# Altium PCB Hyperloop_BTCU-PCB.PcbDoc
Units mil, origin at the board's own origin, x right, y up, seen from the top; angles counter-clockwise.
Board outline 3700 x 3000 mil, 4 copper layers (Top Copper, Plane (GND), Plane (+5V), Bottom Copper), stack 61.811 mil thick; 103 components, 77 nets, 340 pads, 93 vias.
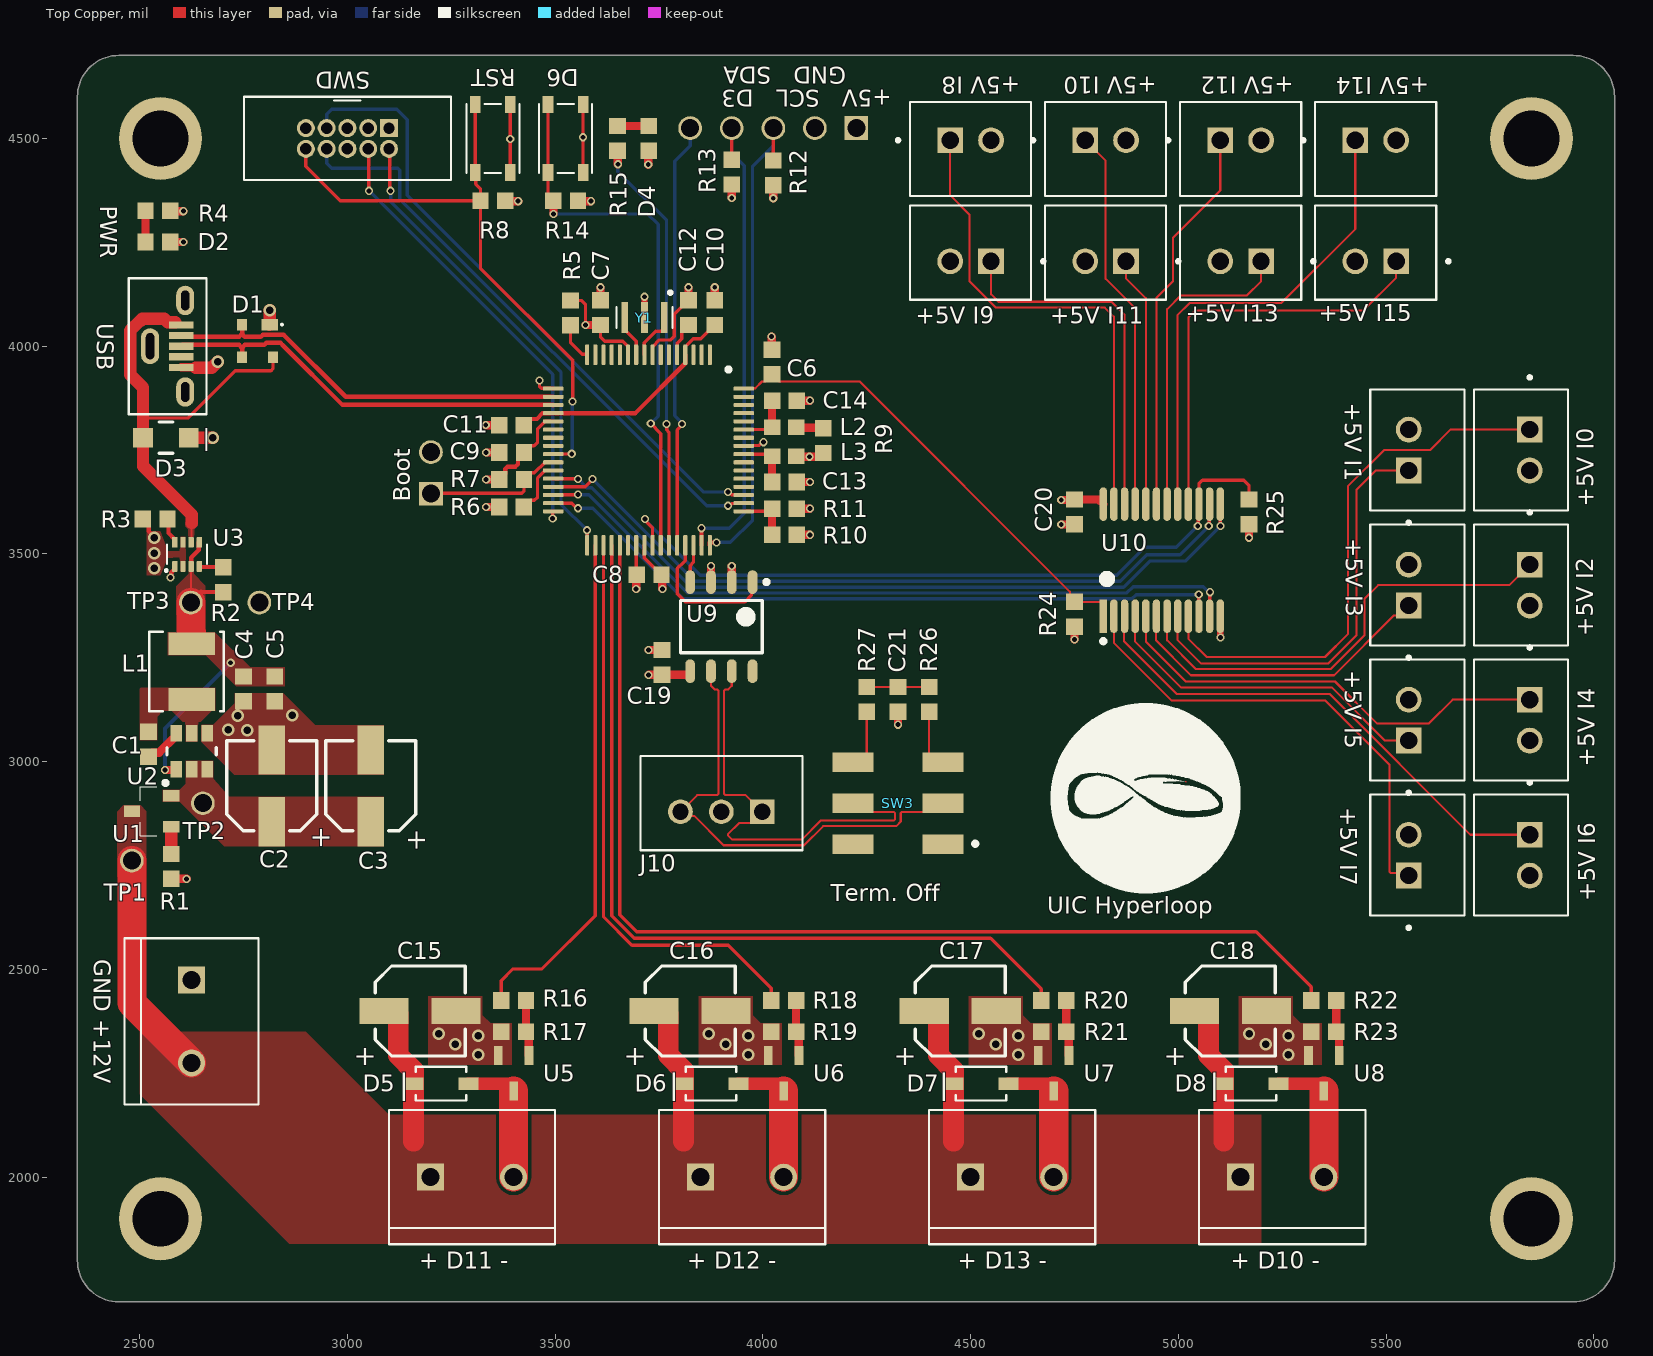
[diagram p0: Top Copper view]
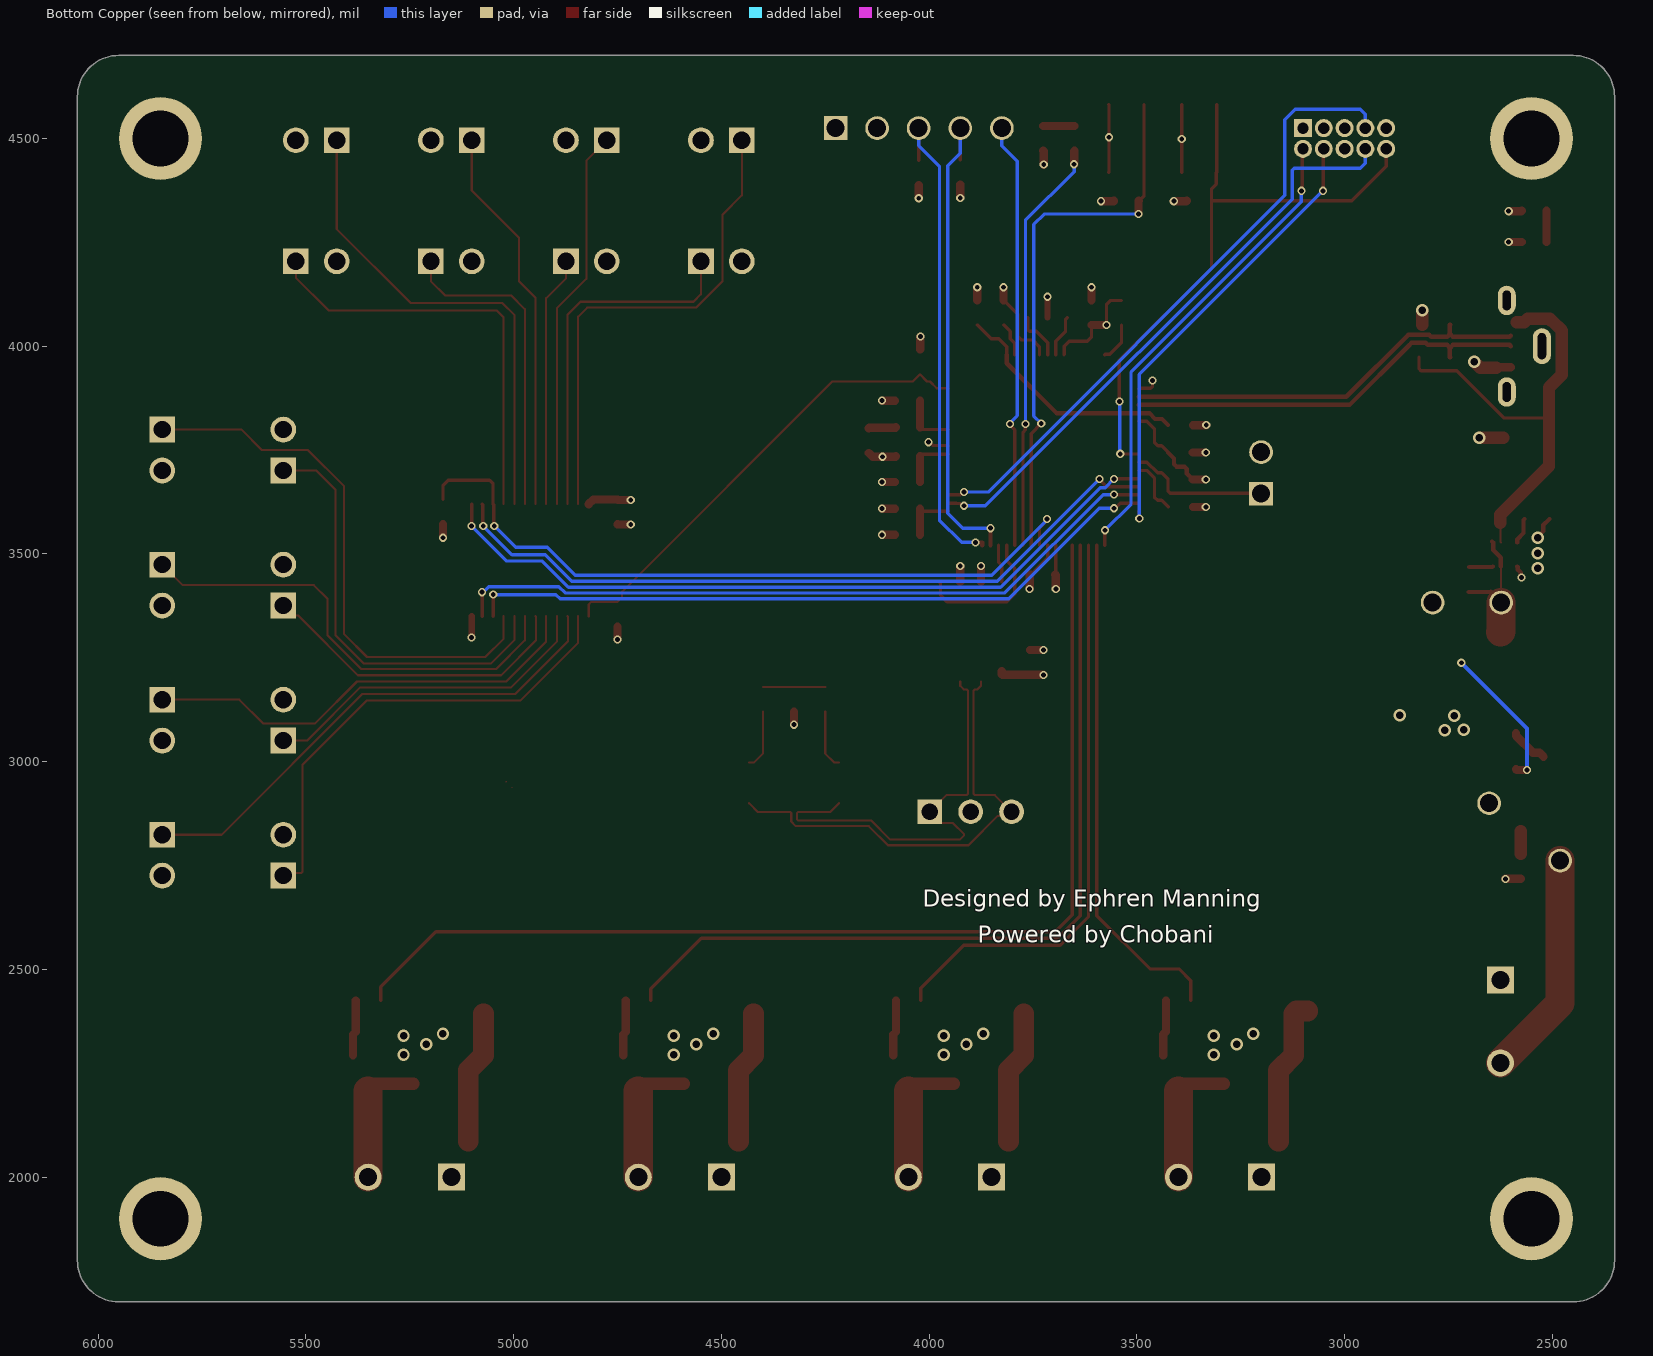
[diagram p1: Bottom Copper view, seen from below]
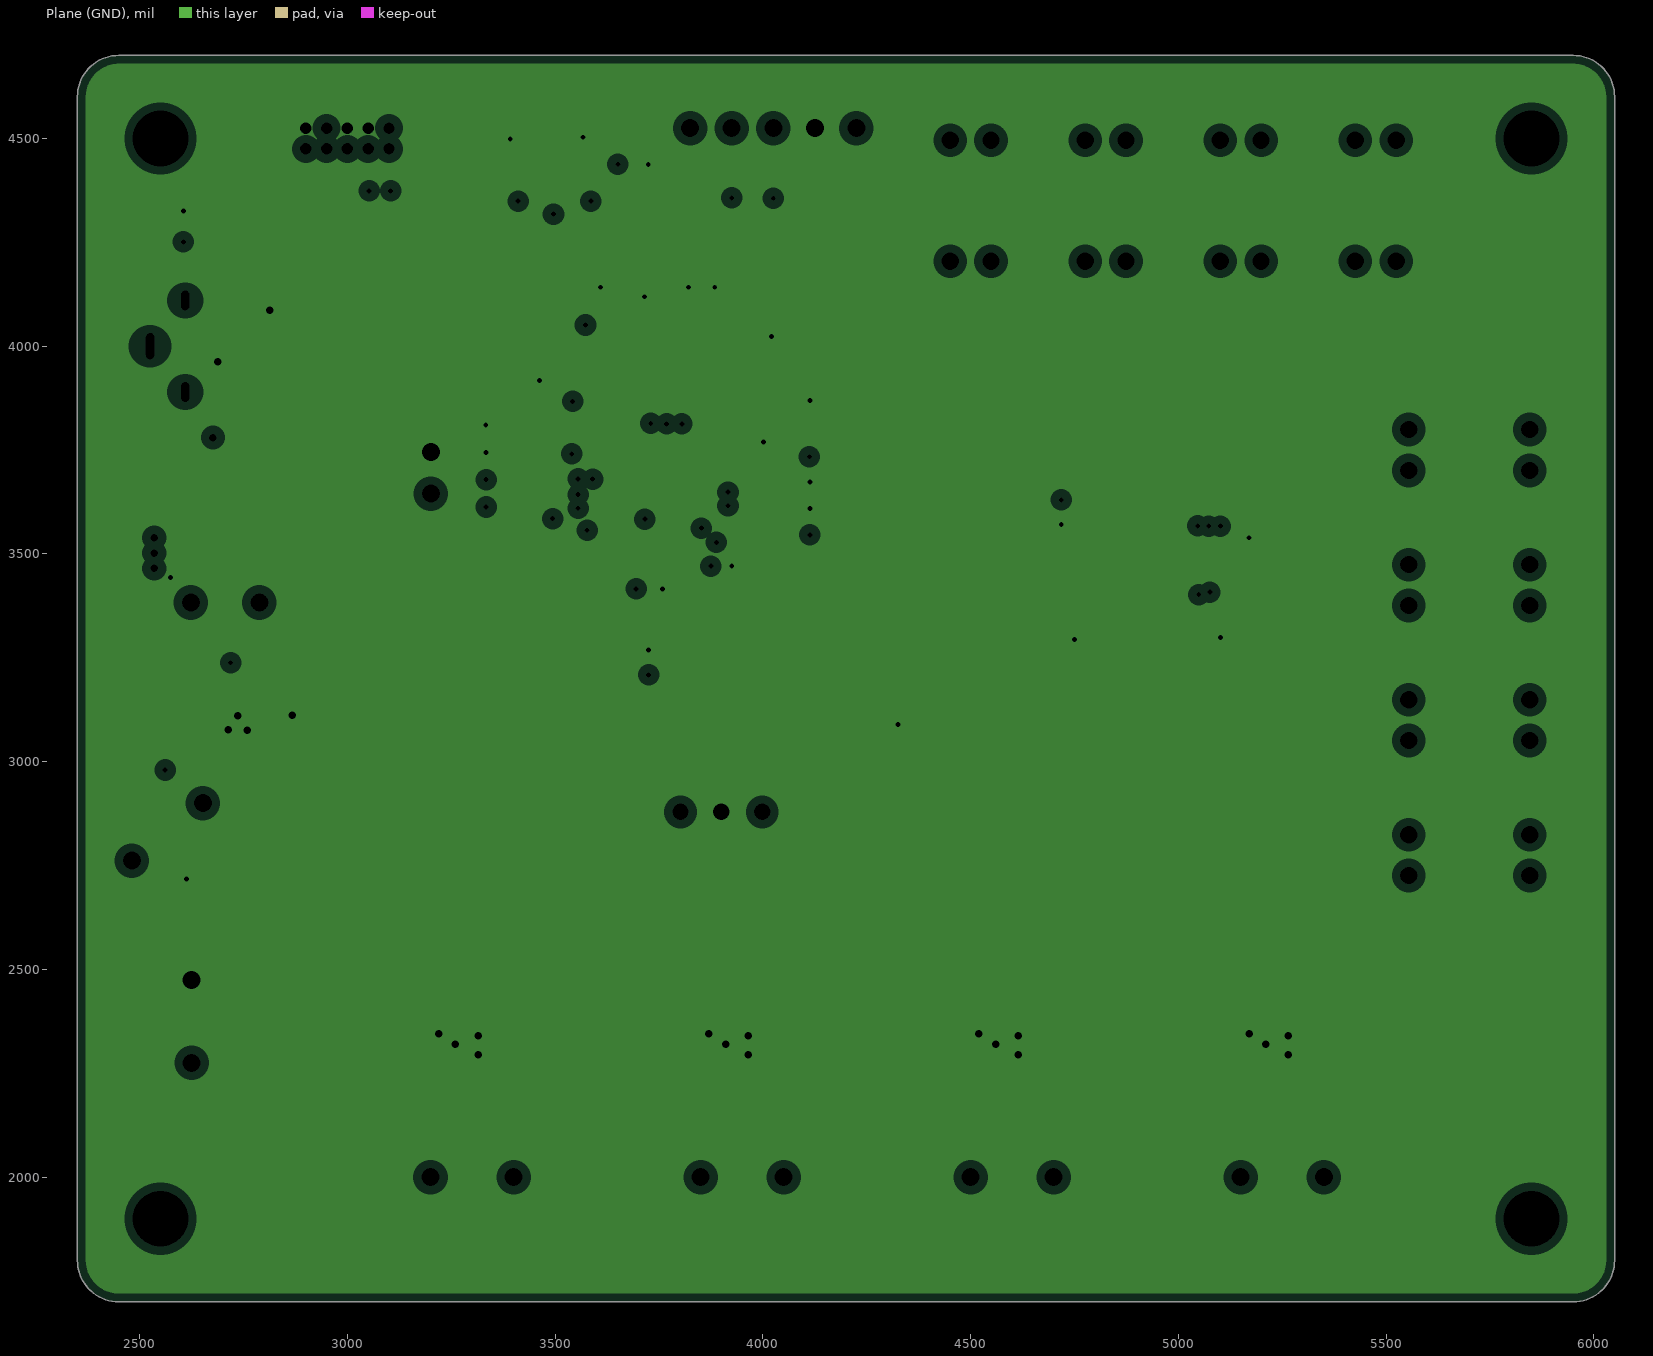
[diagram p2: Plane (GND), clearances drawn from the general rule]
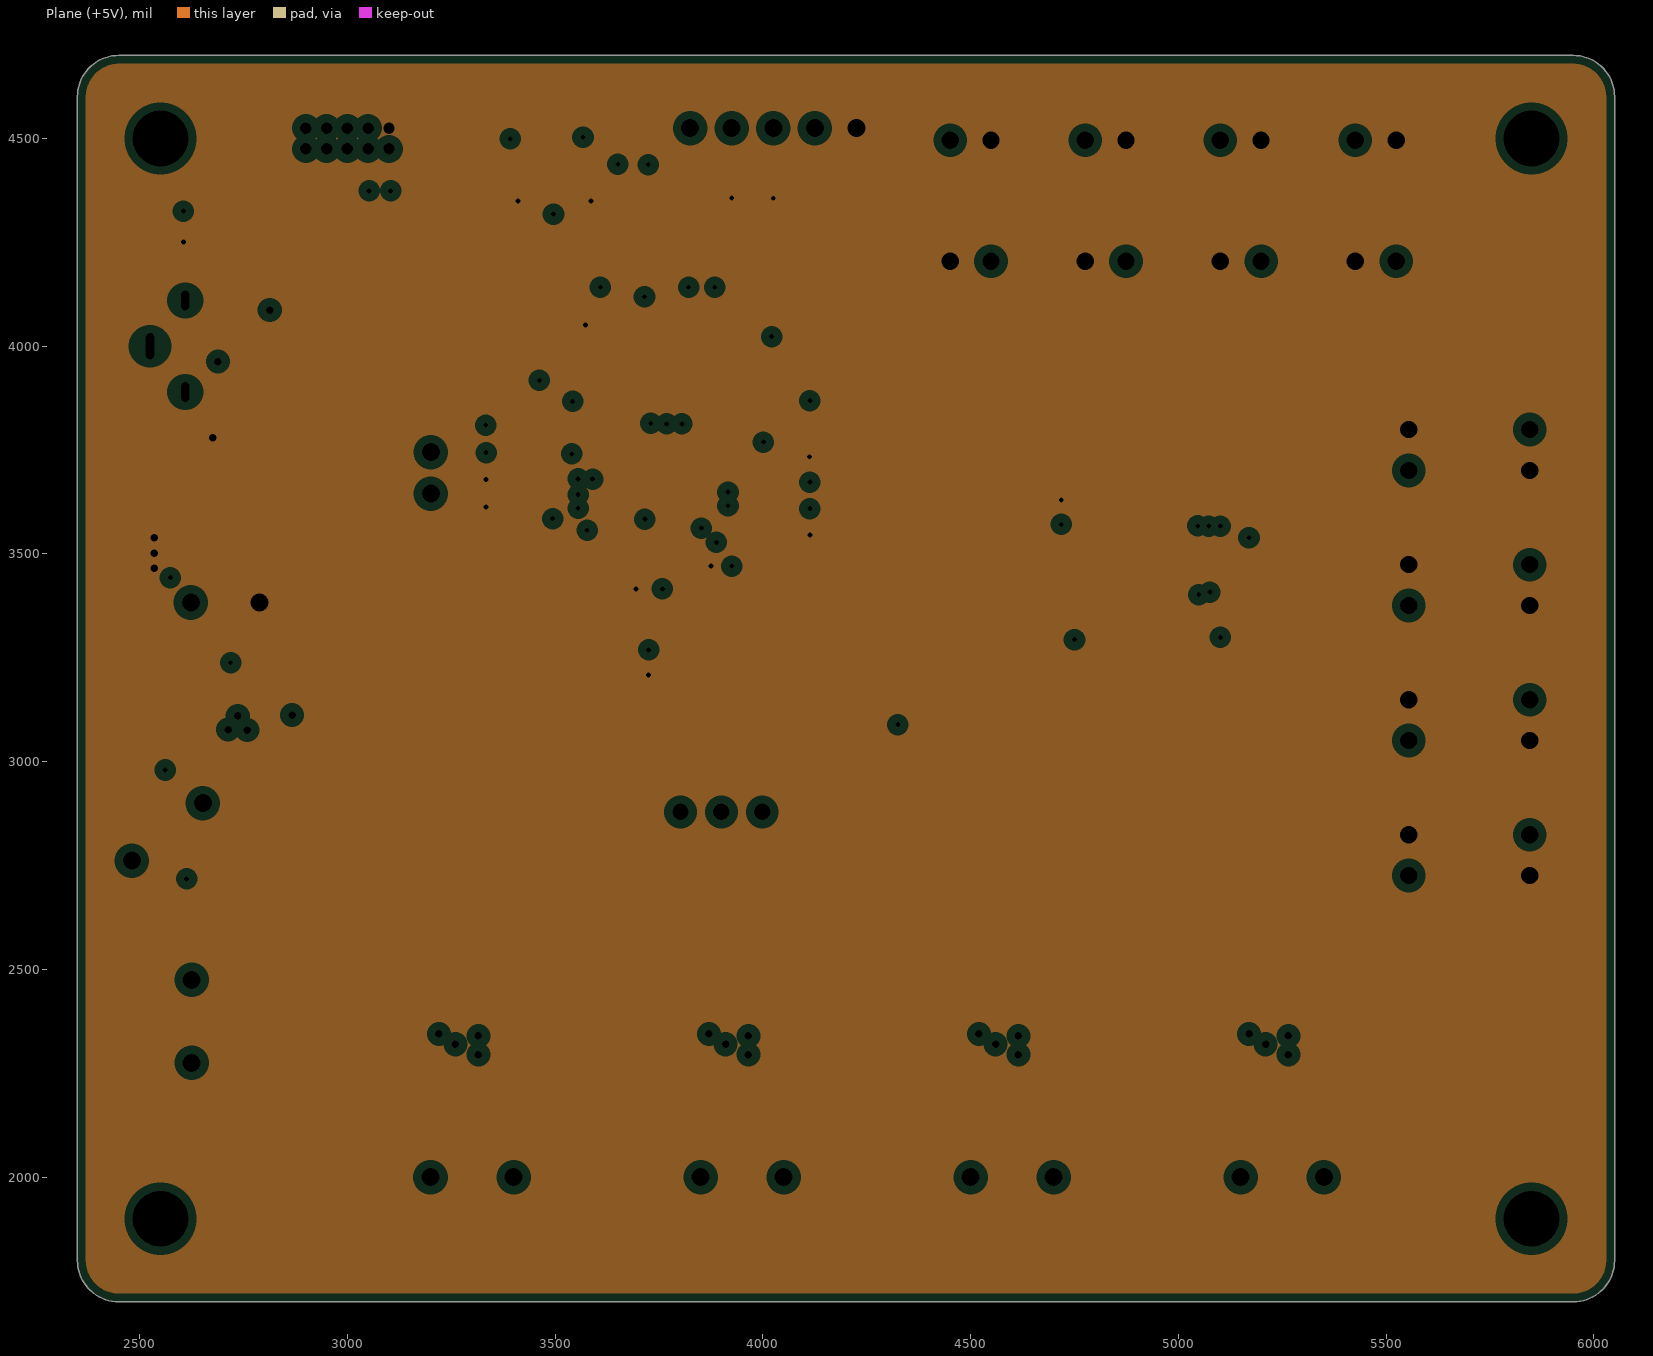
[diagram p3: Plane (+5V), clearances drawn from the general rule]
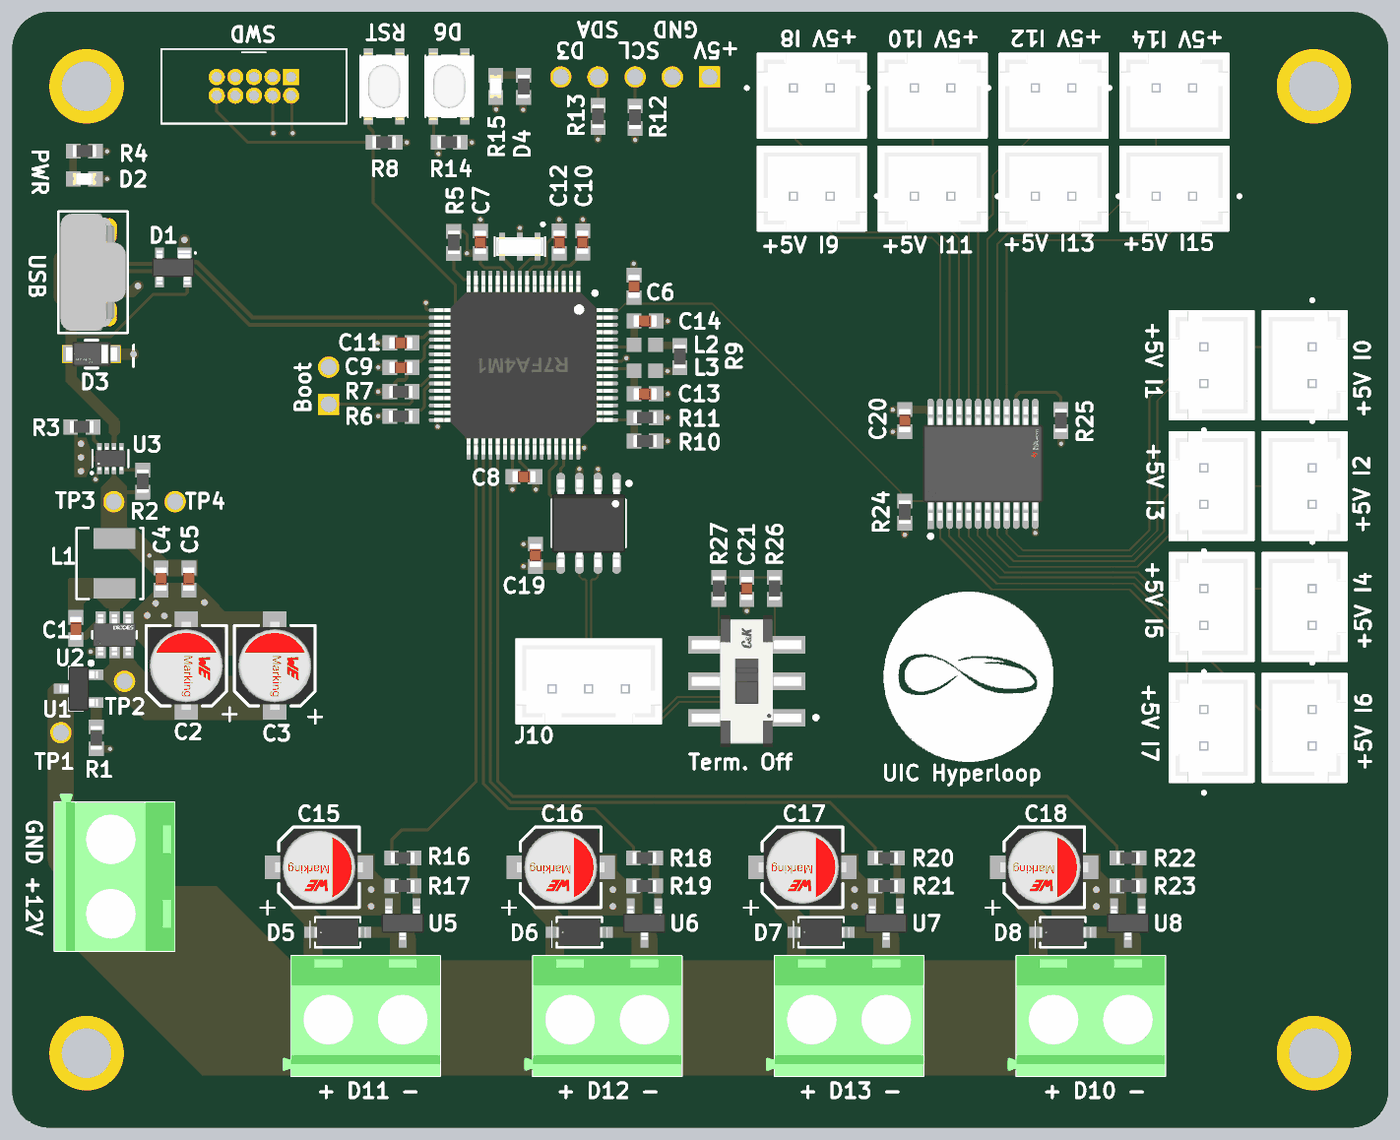
[diagram p4: 3D render of the assembled board from above, using the file's embedded part models]

## Layer stack, top to bottom
Top Mask: solder mask 0.591, Solder Resist, Dk 3.8
Top Copper: signal copper 1.378
Dielectric 1: prepreg 7.874, 7628, Dk 4.6
Plane (GND): plane copper 0.689, net GND
Core: core 41.929, FR-4, Dk 4.5
Plane (+5V): plane copper 0.689, net +5V
Dielectric 2: prepreg 7.874, 7628, Dk 4.6
Bottom Copper: signal copper 1.378
Bottom Mask: solder mask 0.591, Solder Resist, Dk 3.8

## Board outline
2350,1800 2350,4600 cw(c2450,4600) 2450,4700 5950,4700 cw(c5950,4600) 6050,4600 6050,1800 cw(c5950,1800) 5950,1700 2450,1700 cw(c2450,1800)

## Design rules (kind name [scope] priority, off if disabled: settings)
BoardOutlineClearance [All] p1: gap=7.87 ignorepadtopadclearanceinfootprint=FALSE except(15.75: Arc-SplitBarrior Arc-SplitContinuation Track-SplitBarrior Track-SplitContinuation SMDPad-SplitBarrior SMDPad-SplitContinuation THPad-SplitBarrior THPad-SplitContinuation Via-SplitBarrior Via-SplitContinuation Fill-SplitBarrior Fill-SplitContinuation Poly-SplitBarrior Poly-SplitContinuation Region-SplitBarrior Region-SplitContinuation Text-SplitBarrior Text-SplitContinuation)
Clearance [All] p1: gap=7.87 ignorepadtopadclearanceinfootprint=TRUE except(3.5: Arc-Arc Arc-Track Arc-SMDPad Track-Track Track-SMDPad SMDPad-SMDPad; 5: Arc-Via Track-Via SMDPad-Via THPad-Via Via-Via; 10: Arc-Text Track-Text SMDPad-Text THPad-Text Via-Text Fill-Text Poly-Text Region-Text Text-Text)
DiffPairsRouting DiffPairsRouting-CAN [InDifferentialPair('CAN')] p1: maxlimit=8.3 minlimit=8.3 mostfreqgap=8.3 toplayer_minwidth=5.11 toplayer_maxwidth=5.11 toplayer_prefwidth=5.11 bottomlayer_minwidth=5.11 bottomlayer_maxwidth=5.11 bottomlayer_prefwidth=5.11 impedanceprofiledriven=TRUE impedanceprofileid={14C260C6-A4EA-48F1-8B74-18B56ED2C369} impedanceprofilevalue=120.000000 maxuncoupledlength=500
DiffPairsRouting DiffPairsRouting-USB [InDifferentialPair('USB_D')] p2: maxlimit=8.3 minlimit=8.3 mostfreqgap=8.3 toplayer_minwidth=11 toplayer_maxwidth=11 toplayer_prefwidth=11 bottomlayer_minwidth=11 bottomlayer_maxwidth=11 bottomlayer_prefwidth=11 impedanceprofiledriven=TRUE impedanceprofileid={F6B63595-90AE-426A-86AF-9529F4F763D2} impedanceprofilevalue=90.000000 maxuncoupledlength=500
HoleSize [All] p1: absolutevalues=TRUE maxlimit=248.03 minlimit=7.87 maxpercent=80.000 minpercent=20.000
MinimumAnnularRing [All] p1: minimumring=3
MinimumSolderMaskSliver [All] p1 off: minsoldermaskwidth=3.94
PlaneClearance [All] p1: clearance=20
PlaneConnect [All] p1: planeconnectstyle=Direct reliefexpansion=20 reliefentries=4 reliefconductorwidth=10 reliefairgap=10
PolygonConnect PolygonConnect_1 [All] p1: connectstyle=Direct reliefconductorwidth=20 reliefentries=4 polygonreliefangle="90 Angle" airgapwidth=10
RoutingCorners [All] p1: cornerstyle=Round minsetback=100 maxsetback=100
RoutingVias [All] p1: holewidth=19.68 width=39.37 viastyle="Through Hole" minholewidth=7.87 minwidth=17.72 maxholewidth=39.37 maxwidth=78.74
SilkToSilkClearance [All] p1: silktosilkclearance=3.94
SilkToSolderMaskClearance [IsPad] p1: minsilkscreentomaskgap=3.94 clearancetoexposedcopper=TRUE
SolderMaskExpansion [All] p1: expansion=0 istentingtop=FALSE
UnRoutedNet [All] p1: checkbadconnections=TRUE
Width [All] p1: maxlimit=100 minlimit=3.5 preferedwidth=15
21 further rules are at their usual default settings.

## Classes and differential pairs
component class U_3_Peripherals: "+5V I0" "+5V I1" "+5V I2" "+5V I3" "+5V I4" "+5V I5" "+5V I6" "+5V I7" "+5V I8" "+5V I9" "+5V I10" "+5V I11" "+5V I12" "+5V I13" "+5V I14" "+5V I15" "+ D11 -" C15 C16 C17 C18 C19 C20 C21 D5 D6 D7 D8 J10 R16 R17 R18 R19 R20 R21 R22 R23 R24 R25 R26 R27 SW3 U5 U6 U7 U8 U9 U10
component class U_2_MCU: Boot C6 C7 C8 C9 C10 C11 C12 C13 C14 D4 L2 L3 R5 R6 R7 R8 R9 R10 R11 R12 R13 R14 R15 Y1
component class U_1_Power: C1 C2 C3 C4 C5 D1 D2 D3 L1 R1 R2 R3 R4 TP1 TP2 TP3 TP4 U1 U2 U3
differential pair USB_D: +USB_D_P -USB_D_N
differential pair CAN: +CAN_P -CAN_N

## Components (designator, comment, footprint, x,y, rotation, side; value= is the part's Value field where it differs from the comment)
"+5V I0" "B2B-XH-A" JST_B2B-XH-A 5575,3750 r270 top (schematic designator J19)
"+5V I1" "B2B-XH-A" JST_B2B-XH-A 5825,3750 r90 top (schematic designator J11)
"+5V I2" "B2B-XH-A" JST_B2B-XH-A 5575,3425 r270 top (schematic designator J20)
"+5V I3" "B2B-XH-A" JST_B2B-XH-A 5825,3425 r90 top (schematic designator J12)
"+5V I4" "B2B-XH-A" JST_B2B-XH-A 5575,3100 r270 top (schematic designator J21)
"+5V I5" "B2B-XH-A" JST_B2B-XH-A 5825,3100 r90 top (schematic designator J13)
"+5V I6" "B2B-XH-A" JST_B2B-XH-A 5575,2775 r270 top (schematic designator J22)
"+5V I7" "B2B-XH-A" JST_B2B-XH-A 5825,2775 r90 top (schematic designator J14)
"+5V I8" "B2B-XH-A" JST_B2B-XH-A 4500,4225 r0 top (schematic designator J23)
"+5V I9" "B2B-XH-A" JST_B2B-XH-A 4500,4475 r180 top (schematic designator J15)
"+5V I10" "B2B-XH-A" JST_B2B-XH-A 4825,4225 r0 top (schematic designator J24)
"+5V I11" "B2B-XH-A" JST_B2B-XH-A 4825,4475 r180 top (schematic designator J16)
"+5V I12" "B2B-XH-A" JST_B2B-XH-A 5150,4225 r0 top (schematic designator J25)
"+5V I13" "B2B-XH-A" JST_B2B-XH-A 5150,4475 r180 top (schematic designator J17)
"+5V I14" "B2B-XH-A" JST_B2B-XH-A 5475,4225 r0 top (schematic designator J26)
"+5V I15" "B2B-XH-A" JST_B2B-XH-A 5475,4475 r180 top (schematic designator J18)
"+ D10 -" "282837-2" TE_282837-2 5250,2000 r0 top (schematic designator J9)
"+ D11 -" "282837-2" TE_282837-2 3300,2000 r0 top (schematic designator J6)
"+ D12 -" "282837-2" TE_282837-2 3950,2000 r0 top (schematic designator J7)
"+ D13 -" "282837-2" TE_282837-2 4600,2000 r0 top (schematic designator J8)
Boot "2x Pin Header" "2x Pin Header-Footprint-1" 3201,3645 r90 top (schematic designator J4)
C1 "100n" CAP_0603-Footprint 2521,3042 r270 top
C2 "DNP" WCAP-AS5H_D5H5.5 2818,2942 r270 top
C3 "10u/35V" WCAP-AS5H_D5H5.5 3056,2942 r270 top
C4 "22u" CAP_0603-Footprint 2750,3175 r90 top
C5 "22u" CAP_0603-Footprint 2825,3175 r90 top
C6 "100n" CAP_0603-Footprint 4022,3962 r270 top
C7 "100n" CAP_0603-Footprint 3609,4080.88 r270 top
C8 "100n" CAP_0603-Footprint 3726,3450 r180 top
C9 "4.7u" CAP_0603-Footprint 3395,3744 r0 top
C10 "100n" CAP_0603-Footprint 3884,4081 r270 top
C11 "4.7u" CAP_0603-Footprint 3394.88,3810 r0 top
C12 "4.7u" CAP_0603-Footprint 3821,4081 r270 top
C13 "100n" CAP_0603-Footprint 4052,3673 r180 top
C14 "1u" CAP_0603-Footprint 4052,3869 r180 top
C15 "22u/25V" WCAP-ASLI_D5H5.5 3175,2400 r180 top
C16 "22u/25V" WCAP-ASLI_D5H5.5 3825,2400 r180 top
C17 "22u/25V" WCAP-ASLI_D5H5.5 4475,2400 r180 top
C18 "22u/25V" WCAP-ASLI_D5H5.5 5125,2400 r180 top
C19 "100n" CAP_0603-Footprint 3757,3238.88 r270 top
C20 "100n" CAP_0603-Footprint 4750,3601 r90 top
C21 "4.7n" CAP_0603-Footprint 4325,3150 r90 top
D1 "PRTR5V0U2X,215" SOT143B 2783.4,4012.63 r180 top
D2 "LTST-C191KGKT" LED_0603-Footprint-1 2544,4251 r0 top
D3 "DNP" FP-SOD123W-MFG 2563.12,3780 r180 top
D4 "LTST-C191KGKT" LED_0603-Footprint-1 3650,4500 r270 top
D5 "1N4007FL" SOD-123_ONS 3225,2225 r0 top
D6 "PTS810_SJM_250_SMTR_LFS" SW_PTS810_SJM_250_SMTR_LFS 3525,4500 r90 top (schematic designator SW2)
D6 "1N4007FL" SOD-123_ONS 3875,2225 r0 top
D7 "1N4007FL" SOD-123_ONS 4525,2225 r0 top
D8 "1N4007FL" SOD-123_ONS 5175,2225 r0 top
"GND +12V" "282837-2" TE_282837-2 2625,2375 r270 top (schematic designator J1)
J2 "1051330001" MOLEX_1051330001 2567.32,4000 r270 top
J5 "5x Pin Header" "5x Pin Header-Footprint-1" 4225,4525 r180 top
J10 "B3B-XH-A" JST_B3B-XH-A 3900,2900 r0 top
L1 "4.7u" IND_SRP0412-1R0K_BRN 2612.6,3216.93 r270 top
L2 "BLM18PG471SN1D" BEADC1608X95N 4051,3805 r180 top
L3 "BLM18PG471SN1D" BEADC1608X95N 4051,3735 r180 top
R1 "1k" RES_0603-Footprint-1 2576,2748 r90 top
R2 "5.1k" RES_0603-Footprint-1 2701,3438 r270 top
R3 "5.1k" RES_0603-Footprint-1 2537,3584 r180 top
R4 "604" RES_0603-Footprint-1 2544,4326 r0 top
R5 "5.1k" RES_0603-Footprint-1 3537,4080 r270 top
R6 "5.1k" RES_0603-Footprint-1 3394.88,3613 r180 top
R7 "5.1k" RES_0603-Footprint-1 3395,3679 r180 top
R8 "5.1k" RES_0603-Footprint-1 3350,4350 r0 top
R9 "5.1k" RES_0603-Footprint-1 4145,3773 r90 top
R10 "100k" RES_0603-Footprint-1 4052,3546 r0 top
R11 "13.7k" RES_0603-Footprint-1 4052,3609 r180 top
R12 "TBD" RES_0603-Footprint-1 4025,4417 r270 top
R13 "TBD" RES_0603-Footprint-1 3925,4419.12 r270 top
R14 "5.1k" RES_0603-Footprint-1 3525,4350 r0 top
R15 "604" RES_0603-Footprint-1 3725,4500 r270 top
R16 "1k" RES_0603-Footprint-1 3400,2425 r0 top
R17 "100k" RES_0603-Footprint-1 3400,2350 r0 top
R18 "1k" RES_0603-Footprint-1 4050,2425 r0 top
R19 "100k" RES_0603-Footprint-1 4050,2350 r0 top
R20 "1k" RES_0603-Footprint-1 4700,2425 r0 top
R21 "100k" RES_0603-Footprint-1 4700,2350 r0 top
R22 "1k" RES_0603-Footprint-1 5350,2425 r0 top
R23 "100k" RES_0603-Footprint-1 5350,2350 r0 top
R24 "100k" RES_0603-Footprint-1 4750,3354.88 r90 top
R25 "5.1k" RES_0603-Footprint-1 5170,3601 r90 top
R26 "60R4" RES_0603-Footprint-1 4400,3150 r90 top
R27 "60R4" RES_0603-Footprint-1 4250,3150 r90 top
RST "PTS810_SJM_250_SMTR_LFS" SW_PTS810_SJM_250_SMTR_LFS 3350,4500 r90 top (schematic designator SW1)
SW3 "JS202011SCQN" FP-JS202011SCQN-MFG 4325,2900 r90 top
SWD "SWD" CNC_3221-10-0100-00 3000,4500 r180 top (schematic designator J3)
TP1 "PTH Test Point" "PTH Test Point-Footprint-1"#1 2478,2762 r180 top
TP2 "PTH Test Point" "PTH Test Point-Footprint-1"#2 2652,2900 r0 top
TP3 "PTH Test Point" "PTH Test Point-Footprint-1"#2 2623,3383 r0 top
TP4 "PTH Test Point" "PTH Test Point-Footprint-1"#2 2788,3383 r0 top
U1 "P-CH" SOT95P242X110-3N 2528.76,2880.4 r180 top
U2 "AP63205WU-7" FP-TSOT26-MFG 2625,3025 r90 top
U3 "Power Mux" SOTFL50P160X60-8N 2614,3499 r90 top
U4 "R7FA4M1AB3CFM" R7FA4M1AB3CFM-Footprint-1 3725,3750 r0 top
U5 "PMV20XNER" SOT95P230X110-3N 3400,2250 r270 top
U6 "PMV20XNER" SOT95P230X110-3N 4050,2250 r270 top
U7 "PMV20XNER" SOT95P230X110-3N 4700,2250 r270 top
U8 "PMV20XNER" SOT95P230X110-3N 5350,2250 r270 top
U9 "CAN Trans." SOIC127P600X175-8N 3900,3325 r270 top
U10 "CD74HC4067SM96" "CD74HC4067SM96 - SSOP24" 4960,3485 r90 top
Y1 "DNP" OSC_CSTNE12M0G55Z000R0 3715,4069 r180 top

## Footprints (in the part's own frame and the unit in brackets; to place one, negate y for a bottom-side part, rotate by r counter-clockwise, add the part's x,y. Pads: shape width x height; smd on the part's side, far side on the other; paste and mask are expansions set on the pad)
"2x Pin Header-Footprint-1" [mm]
  rect 1.45x1.45 / inner round 1.45 / far side rect 1.45x1.45 hole 1.1: 1(0,0)
  round 1.45 hole 1.1: 2(2.54,0)
"5x Pin Header-Footprint-1" [mm]
  rect 1.45x1.45 / inner round 1.45 / far side rect 1.45x1.45 hole 1.1: 1(0,0)
  round 1.45 hole 1.1: 2(2.54,0) 3(5.08,0) 4(7.62,0) 5(10.16,0)
BEADC1608X95N [mm]
  rect 1x0.97 smd: 1(-0.735,0) 2(0.735,0)
CAP_0603-Footprint [mm] "0603 Cap Generic FP"
  rect 1x1.02 smd: 1(-0.759,0) 2(0.759,0)
  body extent -0.8,-0.4 0.8,0.4, height 1
"CD74HC4067SM96 - SSOP24" [mm]
  rect 2.053x0.455 smd paste+0 mask+0: 1(-3.425,3.575)
  rrect100% 2.053x0.455 smd paste+0 mask+0: 2(-3.425,2.925) 3(-3.425,2.275) 4(-3.425,1.625) 5(-3.425,0.975) 6(-3.425,0.325) 7(-3.425,-0.325) 8(-3.425,-0.975) 9(-3.425,-1.625) 10(-3.425,-2.275) 11(-3.425,-2.925) 12(-3.425,-3.575) 13(3.425,-3.575) 14(3.425,-2.925) 15(3.425,-2.275) 16(3.425,-1.625) 17(3.425,-0.975) 18(3.425,-0.325) 19(3.425,0.325) 20(3.425,0.975) 21(3.425,1.625) 22(3.425,2.275) 23(3.425,2.925) 24(3.425,3.575)
  silkscreen extent -5.08,3.1 -0.9,3.7, body extent -4.7,-4.35 4.7,4.35, height 0.25
CNC_3221-10-0100-00 [mm]
  rect 1.1x1.1 hole 0.7: 1(-2.54,-0.635)
  round 1.1 hole 0.7: 2(-2.54,0.635) 3(-1.27,-0.635) 4(-1.27,0.635) 5(0,-0.635) 6(0,0.635) 7(1.27,-0.635) 8(1.27,0.635) 9(2.54,-0.635) 10(2.54,0.635)
  silkscreen extent -6.32,-2.55 6.32,2.55
FP-JS202011SCQN-MFG [mm]
  rect 1.2x2.5 smd paste+0 mask+0: 1(-2.5,-2.75) 2(0,-2.75) 3(2.5,-2.75) 4(-2.5,2.75) 5(0,2.75) 6(2.5,2.75)
  silkscreen extent -2.6,-4.85 -2.35,-4.6, body extent -4.6,-4.1 4.6,4.1, height 0.25
FP-SOD123W-MFG [mm]
  rect 1.2x1.2 smd paste-1000 mask+0: 1(-1.4,0) 2(1.4,0)
  silkscreen extent -0.43,-0.95 0.43,0.95, body extent -2.2,-1.05 2.2,1.05, height 0.25
FP-TSOT26-MFG [mm]
  rect 1x0.7 smd paste+0 mask+0: 1(-1.099,0.95) 2(-1.099,0) 3(-1.099,-0.95) 4(1.099,-0.95) 5(1.099,0) 6(1.099,0.95)
  silkscreen extent -2.06,-1.5 0.22,1.72, body extent -1.7,-1.6 1.7,1.6, height 0.25
IND_SRP0412-1R0K_BRN [mil]
  rect 55x112 smd paste+0 mask+0: 1(-66.93,12.4) 2(66.93,12.4)
  silkscreen extent -96,-90 96,90
JST_B2B-XH-A [mm]
  rect 1.575x1.575 / inner round 1.575 / far side rect 1.575x1.575 hole 1.05: 1(1.25,-0.525)
  round 1.575 hole 1.05: 2(-1.25,-0.525)
  silkscreen extent -3.7,-2.88 4.54,2.88, body extent -3.7,-2.88 3.7,2.88, height 7.01
JST_B3B-XH-A [mm]
  rect 1.508x1.508 / inner round 1.508 / far side rect 1.508x1.508 hole 1: 1(2.5,-0.525)
  round 1.508 hole 1: 2(0,-0.525) 3(-2.5,-0.525)
  silkscreen extent -4.95,-2.88 4.95,2.88, body extent -4.95,-2.88 4.95,2.88, height 7
LED_0603-Footprint-1 [mm] "Generic 0603 LED. Footprint"
  rect 1x1.02 smd: 1(-0.759,0) 2(0.759,0)
  body extent -0.8,-0.4 0.8,0.4, height 0.55
MOLEX_1051330001 [mm]
  rect 0.448x1.5 smd: 1(-1.3,0.825) 2(-0.65,0.825) 3(0,0.825) 4(0.65,0.825) 5(1.3,0.825)
  oval 1.8x1.1 hole 0.5 slot 1.2 at 0 deg mask+0.064: SH1(-2.8,1.075) SH3(2.8,1.075)
  oval 2.2x1.1 hole 0.5 slot 1.6 at 0 deg mask+0.064: SH2(0,-1.075)
  silkscreen extent -4.15,-2.37 4.15,2.37, body extent -4,-2.22 4,2.22, height 7.51
OSC_CSTNE12M0G55Z000R0 [mm]
  rect 0.4x1.9 smd: 1(-1.2,0) 2(0,0) 3(1.2,0)
  silkscreen extent -1.72,-1.62 1.72,0.65, body extent -1.6,-0.65 1.6,0.65, height 0.8
"PTH Test Point-Footprint-1"#1 [mm]
  round 1.45 hole 1.1: 1(-0.076,0)
"PTH Test Point-Footprint-1"#2 [mm]
  round 1.45 hole 1.1: 1(0,0)
R7FA4M1AB3CFM-Footprint-1 [mm]
  rrect50% 0.25x1.25 smd: 1(3.74,5.829) 2(3.24,5.829) 3(2.74,5.829) 4(2.24,5.829) 5(1.74,5.829) 6(1.24,5.829) 7(0.74,5.829) 8(0.24,5.829) 9(-0.26,5.829) 10(-0.76,5.829) 11(-1.26,5.829) 12(-1.76,5.829) 13(-2.26,5.829) 14(-2.76,5.829) 15(-3.26,5.829) 16(-3.76,5.829) 33(-3.76,-5.821) 34(-3.26,-5.821) 35(-2.76,-5.821) 36(-2.26,-5.821) 37(-1.76,-5.821) 38(-1.26,-5.821) 39(-0.76,-5.821) 40(-0.26,-5.821) 41(0.24,-5.821) 42(0.74,-5.821) 43(1.24,-5.821) 44(1.74,-5.821) 45(2.24,-5.821) 46(2.74,-5.821) 47(3.24,-5.821) 48(3.74,-5.821)
  rrect50% 1.25x0.25 smd: 17(-5.835,3.754) 18(-5.835,3.254) 19(-5.835,2.754) 20(-5.835,2.254) 21(-5.835,1.754) 22(-5.835,1.254) 23(-5.835,0.754) 24(-5.835,0.254) 25(-5.835,-0.246) 26(-5.835,-0.746) 27(-5.835,-1.246) 28(-5.835,-1.746) 29(-5.835,-2.246) 30(-5.835,-2.746) 31(-5.835,-3.246) 32(-5.835,-3.746) 49(5.815,-3.746) 50(5.815,-3.246) 51(5.815,-2.746) 52(5.815,-2.246) 53(5.815,-1.746) 54(5.815,-1.246) 55(5.815,-0.746) 56(5.815,-0.246) 57(5.815,0.254) 58(5.815,0.754) 59(5.815,1.254) 60(5.815,1.754) 61(5.815,2.254) 62(5.815,2.754) 63(5.815,3.254) 64(5.815,3.754)
  silkscreen extent 4.75,4.8 5,5.05, body extent -6.11,-6.1 6.09,6.1, height 1.67
RES_0603-Footprint-1 [mm] "Generic 0603 Res. Footprint"
  rect 1x1.02 smd: 1(-0.759,0) 2(0.759,0)
  body extent -0.8,-0.4 0.8,0.4, height 0.55
SOD-123_ONS [mil]
  rect 48x30 smd paste+0 mask+0: 1(-66,0) 2(66,0)
  silkscreen extent -61,-40 61,40, body extent -76,-36 76,36, height 53
SOIC127P600X175-8N [mm] "SOIC, 8-Leads, Body 4.90x3.90mm, Pitch 1.27mm, IPC Medium Density"
  oval 1.45x0.6 smd: 1(-2.725,1.905) 2(-2.725,0.635) 3(-2.725,-0.635) 4(-2.725,-1.905) 5(2.725,-1.905) 6(2.725,-0.635) 7(2.725,0.635) 8(2.725,1.905)
  silkscreen extent -2.85,-2.5 1.6,2.88, body extent -3,-2.5 3,2.5, height 1.75
SOT95P230X110-3N [mil]
  rect 46x21 smd: 1(-43,37) 2(-43,-37) 3(43,0)
  body extent -45,-57 45,57, height 43
SOT95P242X110-3N [mm] "SOT23, 3-Leads, Body 2.90x2.42mm, Pitch 0.95mm, IPC Medium Density"
  rect 1x0.7 smd: 1(-1.2,0.95) 2(-1.2,-0.95) 3(1.2,0)
  silkscreen extent -0.3,-1.5 0.7,1.5, body extent -1.3,-1.5 1.3,1.5, height 1.1
SOT143B [mm]
  rect 1x0.7 smd: 1(-0.75,-1)
  rect 0.6x0.7 smd: 2(0.95,-1) 3(0.95,1) 4(-0.95,1)
  silkscreen extent -1.55,-1.05 -1.45,-0.95, body extent -1.45,-1.15 1.45,1.15, height 1.11
SOTFL50P160X60-8N [mm]
  rrect25% 0.66x0.32 smd: 1(-0.735,0.75) 2(-0.735,0.25) 3(-0.735,-0.25) 4(-0.735,-0.75) 5(0.735,-0.75) 6(0.735,-0.25) 7(0.735,0.25) 8(0.735,0.75)
  silkscreen extent -1.04,-1.23 0.6,1.32, body extent -0.8,-1.05 0.8,1.05, height 0.6
SW_PTS810_SJM_250_SMTR_LFS [mm]
  rect 1.05x0.65 smd: 1(-2.075,1.075) 2(2.075,1.075) 3(-2.075,-1.075) 4(2.075,-1.075)
  silkscreen extent -2.1,-1.62 2.1,1.62, body extent -2.3,-1.6 2.3,1.6, height 2.71
TE_282837-2 [mm]
  rect 1.65x1.65 / inner round 1.65 / far side rect 1.65x1.65 hole 1.1: 1(-2.54,0)
  round 1.65 hole 1.1: 2(2.54,0)
  silkscreen extent -5.08,-4.1 5.08,4.1, body extent -5.68,-4.1 5.08,4.1, height 10
WCAP-AS5H_D5H5.5 [mm] "Aluminum Electrolytic Capacitors, 5x5.5mm"
  rect 3x1.6 smd: 1(2.2,0) 2(-2.2,0)
  silkscreen extent -2.75,-2.75 2.75,2.75, body extent -3,-2.65 3,2.65, height 5.5
WCAP-ASLI_D5H5.5 [mm] "Aluminium Electrolytic V-Chip SMT Capacitors, 5x5.5mm"
  rect 3x1.6 smd: 1(2.2,0) 2(-2.2,0)
  silkscreen extent -2.75,-2.75 2.75,2.75, body extent -3,-2.65 3,2.65, height 5.5

## Part data
"+5V I0" "+5V I1" "+5V I2" "+5V I3" "+5V I4" "+5V I5" "+5V I6" "+5V I7" "+5V I8" "+5V I9" "+5V I10" "+5V I11" "+5V I12" "+5V I13" "+5V I14" "+5V I15": library part CMP-074-000001-3, "2x Pin JST-XH", Manufacturer 1="JST Sales America", Manufacturer Part Number 1=B2B-XH-A
"+ D10 -" "+ D11 -" "+ D12 -" "+ D13 -" "GND +12V": library part CMP-079-000000-3, "2x Screw Terminal", Manufacturer 1="TE Connectivity", Manufacturer Part Number 1=282837-2
Boot: library part CMP-00012-3
C1 C6 C7 C8 C10 C13 C19 C20: library part CMP-00029-2, "100nF/16V ±10% Ceramic 0603", Manufacturer 1="Samsung Electro-Mechanics", Manufacturer Part Number 1=CL10B104KO8NNNC
C2 C3: library part CMP-00028-2, "ALUM 10uF 20% 35V SMD", Manufacturer 1="Würth Elektronik", Manufacturer Part Number 1=865230542002
C4 C5: library part CMP-00030-1, "22uF/10V CER 0603", Manufacturer 1="Samsung Electro-Mechanics", Manufacturer Part Number 1=CL10A226MP8NUNE
C9 C11 C12: library part CMP-00032-1, "4.7uF/10V 0603 Ceramic Capacitor", Manufacturer 1="Samsung Electro-Mechanics", Manufacturer Part Number 1=CL10A475KP8NNNC
C14: library part CMP-026-000000-4, "1uF/10V ±10% 0603", Manufacturer 1="Samsung Electro-Mechanics", Manufacturer Part Number 1=CL10B105KP8NNNC
C15 C16 C17 C18: library part CMP-00027-1, "22uF/25V Alum", Manufacturer 1="Würth Elektronik", Manufacturer Part Number 1=865080442004
C21: library part CMP-00036-1, "4.7nF/16V 0603 Ceramic Cap", Manufacturer 1="Walsin Technology Corporation", Manufacturer Part Number 1=0603B472K160CT
D1: library part CMP-018-000000-4, "Diode Array, ESD", Manufacturer 1="Nexperia USA Inc.", Manufacturer Part Number 1=PRTR5V0U2X,215
D2 D4: library part CMP-038-000000-5, "Green 571nm LED Indication - Discrete 2V 0603 (1608 Metric)", Manufacturer 1="Lite-On Inc.", Manufacturer Part Number 1=LTST-C191KGKT
D3: library part CMP-00005-2, "DIODE SCHOTTKY 60V 2A SOD123", RoHS Compliant=Yes
D5 D6 D7 D8: library part CMP-00038-2, "1000V 1A Diode", Manufacturer 1="SMC Diode Solutions", Manufacturer Part Number 1=1N4007FL
D6 RST: library part CMP-014-000000-3, "Tactile Switch SPST-NO Top Actuated Surface Mount", Manufacturer 1=C&K, Manufacturer Part Number 1="PTS810 SJM 250 SMTR LFS"
J2: library part CMP-016-000000-5, "Micro USB Type B 90 Degree Conn", Manufacturer 1=Molex, Manufacturer Part Number 1=1051330001
J5: library part CMP-00034-2
J10: library part CMP-082-000000-2, "3x Pin JST-XH-A", Manufacturer 1="JST Sales", Manufacturer Part Number 1=B3B-XH-A
L1: library part CMP-007-000000-4, "4.7 uH 2.8A Inductor", Manufacturer 1="Bourns Electronics", Manufacturer Part Number 1=SRP0415-4R7K
L2 L3: library part CMP-024-000000-4, "Ferrite Bead, 0603, 470 Ohms @ 100MHz", Manufacturer 1=Murata, Manufacturer Part Number 1=BLM18PG471SN1D
R1 R16 R18 R20 R22: library part CMP-00039-1, "1k 1% 0.1W 0603", Manufacturer 1=YAGEO, Manufacturer Part Number 1=RC0603FR-071KL
R2 R3 R5 R6 R7 R8 R9 R12 R13 R14 R25: library part CMP-028-000000-5, "5.1k Ohms ±1% 0.1W 0603", Manufacturer 1=Yageo, Manufacturer Part Number 1=RC0603FR-075K1L
R4 R15: library part CMP-00040-1, "604 Ohm 1% 1/10 W 0603", Manufacturer 1=YAGEO, Manufacturer Part Number 1=RC0603FR-07604RL
R10 R17 R19 R21 R23 R24: library part CMP-030-000000-4, "100k ±1% 0.1W, 0603", Manufacturer 1=Yageo, Manufacturer Part Number 1=RC0603FR-07100KL
R11: library part CMP-032-000000-3, "13.7K 1% 0,1W 0603", Manufacturer 1=YAGEO, Manufacturer Part Number 1=RC0603FR-0713K7L
R26 R27: library part CMP-046-000000-5, "60.4 Ohms ±1% 0.1W 0603", Manufacturer 1=YAGEO, Manufacturer Part Number 1=RC0603FR-0760R4L
SW3: library part CMP-00035-2, "DPDT SMD SWITCH 300mA 6V", Manufacturer 1=C&K, Manufacturer Part Number 1=JS202011SCQN
SWD: library part CMP-012-000000-3, "SWD Connector", Manufacturer 1="CNC Tech", Manufacturer Part Number 1=3221-10-0100-00
TP1 TP2 TP3 TP4: library part CMP-00011-2, "Plated through-hole test point to allow soldering in pin headers."
U1: library part CMP-00025-1, "Mosfet P-CH 30V 3.8A Vgs(ON) = -10V SOT23", Manufacturer 1="Diodes Incorporated", Manufacturer Part Number 1=DMP3099L-7
U2: library part CMP-00003-3, "AP63205 Series 32 V 2 A 1.1 MHz Synchronous Buck Converter -TSOT-26"
U3: library part CMP-064-000000-3, "TPS2116, Power Mux, 1.6V to 5.5V, 2.5A, SOT-583", Manufacturer 1="Texas Instruments", Manufacturer Part Number 1=TPS2116DRLR, Package=SOT-583
U4: library part CMP-00000-7, "RA4M1 Cortex-M4 Microcontroller 64-LQFP", Manufacturer 1=Renesas, Manufacturer Part Number 1=R7FA4M1AB3CFM#AA0
U5 U6 U7 U8: library part CMP-076-000000-2, "N-Channel 30 V 5.7A (Ta) 510mW (Ta), 6.94W (Tc) Surface Mount TO-236AB", Manufacturer 1="Nexperia USA Inc.", Manufacturer Part Number 1=PMV20XNER
U9: library part CMP-00010-6, "CAN Transceiver, NXP", Manufacturer 1="NXP USA Inc.", Manufacturer Part Number 1=TJA1051T/3,118
U10: library part CMP-00031-4, "16:1 Mux 160 Ohm 24-SSOP", Manufacturer 1="Texas Instruments", Manufacturer Part Number 1=CD74HC4067SM96
Y1: library part CMP-072-000000-4, "12MHz Ceramic Resonator Built in Capacitor 33pF ±0.2% 30 Ohms Surface Mount", Manufacturer 1="Murata Electronics", Manufacturer Part Number 1=CSTNE12M0G55Z000R0

## Free pads (board coordinates)
  round 200 hole 133.86: MH(2550,1900) MH(2550,4500) MH(5850,1900) MH(5850,4500)

## Via types
v1: diameter 19.68, hole 11.81, Top Copper to Bottom Copper, tented both sides, 67 vias
v2: diameter 30, hole 18, Top Copper to Bottom Copper, tented both sides, 26 vias

## Nets (pads, with @x,y where several pads share a name; then routed paths per layer and width w, separated by ;. In a path a pad name is that pad's centre, name@x,y a point inside that pad or via, vN(x,y) a via of type N, cw(c..) or ccw(c..) an arc to the next point about the centre after c; other vN are vias at no path point)
+3V3: C10.2 C11.2 U4.4 U4.20 | length 582.8
  Top Copper w8: U4.4 3813.18,3999.17 3831.77,4017.76 3850.25,4017.76 3883.61,4051.12 C10.2
  Top Copper w10: C11.2 3424.76,3810.31 3439.45,3825 3456,3825 3469.74,3838.74 U4.20 3692.85,3838.74 3813.1,3958.99 3813.1,3979.41 U4.4
+5V: "+5V I0.2" "+5V I1.2" "+5V I2.2" "+5V I3.2" "+5V I4.2" "+5V I5.2" "+5V I6.2" "+5V I7.2" "+5V I8.2" "+5V I9.2" "+5V I10.2" "+5V I11.2" "+5V I12.2" "+5V I13.2" "+5V I14.2" "+5V I15.2" C7.2 C8.2 C9.2 C19.2 C20.2 D2.2 D3.1 J5.1 L3.1 R3.2 R5.1 R6.2 R7.2 R8.2 R9.1 R10.2 R12.2 R13.2 R14.2 SWD.1 TP4.1 U3.2 U3.7 U4.11 U4.21 U4.39 U9.3 U9.5 U10.24 | length 1246.7
  Top Copper w8: C9.2 3424.88,3744.39 3440.57,3760.08 3449.08,3760.08 3457.61,3768.61 3457.61,3801.09 3475.58,3819.06 U4.21 ; R5.1 3564.12,4109.88 3573,4101 v1(3573,4051) ; C7.2 3609,4022.28 3619.69,4011.59 3662.96,4011.59 3674.46,4000.09 3674.46,3980.41 U4.11 ; U4.39 3695.07,3451.05 C8.2
  Top Copper w10: R3.2 2521.8,3569.31 2521.8,3555.2 2525,3552 ; R7.2 3379.8,3693.69 3379.8,3704.14 3385.66,3710 3404.14,3710 3410.2,3716.05 3410.2,3729.31 C9.2
  Top Copper w20: D2.2 v1(2605,4251) ; v1(3334,3613) R6.2 ; v1(3334,3679) R7.2 ; R8.2 3380.88,4349 v1(3411,4349) ; R14.2 3555.88,4349 v1(3586,4349) ; v1(3573,4051) C7.2 ; v1(3695,3416) 3695,3448.88 C8.2 ; v1(3725,3209) C19.2 3823.33,3209 3825,3210.67 U9.5 ; U9.3 v1(3875,3470.82) ; v1(3925,4357) R13.2 ; v1(4025,4356) R12.2 ; L3.1 4080.94,3734 v1(4112,3734) 4135.88,3734 R9.1 ; R10.2 v1(4113,3546) ; v1(4718,3630) 4749.12,3630 C20.2 4808.22,3630.88 U10.24
  Top Copper w30: D3.1 v2(2676,3780)
  other v2: 2535,3465 2535,3502 2535,3539
+12V: "+ D10 -.1" "+ D11 -.1" "+ D12 -.1" "+ D13 -.1" "GND +12V.2" C15.1 C16.1 C17.1 C18.1 D5.1 D6.1@3809,2225 D7.1 D8.1 TP1.1 U1.3 | length 1872
  Top Copper w50: C15.1 3115.94,2400 3122.44,2393.5 3122.44,2293.5 3159,2256.94 D5.1 3159,2086.5 ; C16.1@3772.44,2393.5 3772.44,2293.5 3809,2256.94 3809,2086.5 ; C17.1@4422.44,2393.5 4422.44,2293.5 4459,2256.94 4459,2086.5 ; C18.1@5072.44,2393.5 5072.44,2293.5 5109,2256.94 5109,2086.5
  Top Copper w70: TP1.1 2481,2419 2625,2275
BUCK_OUT: C4.2 C5.2 L1.1 R2.2 TP3.1 U2.1 U3.3 U3.5 | length 632
  Top Copper w5: TP3.1 2623.42,3383.42 2623.42,3469.64 U3.3
  Top Copper w10: U3.3 2624,3470.22 2624,3491 2642.23,3509.23 2642.23,3527.17 U3.5@2644.83,3529.76 ; 2648,3410 2649.88,3408.12 R2.2
  Top Copper w20: v1(2561,2980) 2585.89,2980 U2.1
  Top Copper w70: TP3.1 2623,3313.5 2624.5,3312
  Bottom Copper w10: v1(2561,2980) 2561,3080 v1(2719,3238)
CAN_N: J10.3 SW3.2 U9.6 | length 1110
  Top Copper w5.11: U9.6@3875,3192.72 3875,3182.51 3883.55,3173.96 3890.3,3173.96 3893.3,3170.97 3893.3,2922.44 3890.3,2919.44 3841.69,2919.44 J10.3 3811.33,2869.58 3834.42,2869.58 3905,2799 4099,2799 4145,2845 4320.86,2845 4331.7,2855.85 4331.7,2875.94 4334.7,2878.93 4412.2,2878.93 SW3.2
CAN_P: J10.1 SW3.5 U9.7 | length 1051.8
  Top Copper w5.11: U9.7@3925,3192.72 3925,3182.51 3916.45,3173.96 3909.7,3173.96 3906.7,3170.97 3906.7,2922.44 3909.7,2919.44 3958.31,2919.44 J10.1 3971.3,2852.2 3942.5,2852.2 3916.44,2826.15 3916.44,2821.91 3925.94,2812.41 4093.45,2812.41 4139.45,2858.41 4315.3,2858.41 4318.3,2861.4 4318.3,2875.94 4315.3,2878.93 4237.8,2878.93 SW3.5
D2: D4.2 U4.43 | length 1000.6
  Top Copper w8: v1(3768,3813) 3768.44,3812.56 3768.44,3798.56 3773.81,3793.19 U4.43
  Top Copper w20: D4.2 3651,4469.12 v1(3651,4438)
  Bottom Copper w8: v1(3651,4438) 3651,4420 3768,4303 v1(3768,3813)
D3: J5.5 U4.44 | length 1031.3
  Top Copper w8: U4.44 3793.5,3798.33 3805,3809.84 v1(3805,3813)
  Bottom Copper w8: v1(3805,3813) 3805,3816.16 3788,3833.16 3788,4445 3825,4482 J5.5
D6: D6.1@3482.68,4418.31 D6.2@3482.68,4581.69 R14.1 U4.42 | length 1321.2
  Top Copper w8: D6.2@3482.68,4581.69 3482.68,4418.31 3482.68,4362.44 R14.1 ; v1(3730,3814) 3754.13,3789.87 U4.42
  Top Copper w20: R14.1 3496,4349.12 v1(3496,4318)
  Bottom Copper w8: v1(3496,4318) 3723,4318 3748,4293 3748,3832 v1(3730,3814)
GND: "GND +12V.1" Boot.2 C2.2 C3.2 C4.1 C5.1 C6.1 C7.1 C8.1 C9.1 C10.1 C11.1 C12.1 C13.1 C14.1 C15.2 C16.2 C17.2 C18.2 C19.1 C20.1 C21.1 D1.1 D6.3 D6.4 J2.5 J5.2 J10.2 R1.1 R4.2 R11.1 R15.2 R17.1 R19.1 R21.1 R23.1 R24.1 R25.1 RST.3 RST.4 SWD.3 SWD.5 SWD.9 U2.4 U3.1 U4.8 U4.17 U4.40 U4.57 U5.2 U6.2 U7.2 U8.2 U9.2 U10.12 Y1.2 | length 1570.6
  Top Copper w8: RST.3 3392,4418.63 v1(3392,4499) 3392,4581.37 RST.4 ; v1(3462.24,3917.76) 3462.24,3903.4 3466.92,3898.72 3494.35,3898.72 U4.17 ; D6.3 3567,4418.63 v1(3567,4503) 3567,4581.37 D6.4 ; U4.40 3714.76,3491.13 3739.8,3466.08 3740.2,3466.08 3755.88,3450.39 C8.1 ; U4.8 3734.44,3999.17 3750.27,4015 3778,4015 3787,4024 3787,4077.28 3820.61,4110.88 C12.1 ; U4.57 3954.85,3760.92 3990.1,3760.92 3998.18,3769 v1(4001.34,3769)
  Top Copper w10: v1(2574,3443) 2575.85,3444.85 2575.85,3454.75 2583.17,3462.07 2583.17,3468.76 U3.1
  Top Copper w15: Y1.2 v1(3715,4119) ; U10.12 5100.87,3350.03 5100.87,3299.13 v1(5101,3299)
  Top Copper w20: R4.2 2574.88,4325 v1(2605,4325) ; R1.1 2576.12,2718 v1(2613,2718) ; J2.5 2599.98,3949 J2.5@2628,3949 ; v1(3333,3810) C11.1 ; v1(3334,3744) C9.1 ; C7.1 v1(3609,4142) ; v1(3724,4437) 3724,4469.12 R15.2 ; v1(3725,3269) 3756.76,3269 C19.1 ; C8.1 3758,3447.88 v1(3758,3416) ; C12.1 v1(3821,4142) ; C10.1 v1(3884,4142) ; U9.2 v1(3925,3470.82) ; v1(4021,4023) 4021,3992.88 C6.1 ; R11.1 v1(4113,3609) ; C13.1 v1(4113,3673) ; C14.1 v1(4113,3869) ; v1(4325,3089) C21.1 ; v1(4718,3571) 4749.88,3571 C20.1 ; v1(4750,3294) R24.1 ; v1(5170,3539) R25.1
  Top Copper w30: 2635,3947.96 2672.96,3947.96 v2(2688,3963) ; D1.1 2813,4052.07 v2(2813,4087)
  other v2: 3315,2295 3965,2295 4615,2295 5265,2295 3260,2320 3910,2320 4560,2320 5210,2320 3315,2340 3965,2340 4615,2340 5265,2340 3220,2345 3870,2345 4520,2345 5170,2345 2759,3076 2713,3077 2736,3110 2867,3112
I0: "+5V I1.1" U10.9 | length 1329.3
  Top Copper w5: U10.9 5023.98,3296.02 5068,3252 5353,3252 5408,3307 5408,3663 5495,3750 5605.48,3750 5654.69,3799.21 5845.67,3799.21
I1: "+5V I0.1" U10.8 | length 1034.5
  Top Copper w5: U10.8 4998.39,3292.61 5055,3236 5360,3236 5429,3305 5429,3655 5474.79,3700.79 5554.33,3700.79
I2: "+5V I3.1" U10.7 | length 1115.1
  Top Copper w5: U10.7 4972.8,3292.2 5042,3223 5367,3223 5448.04,3304.04 5448.04,3392.04 5481,3425 5796.46,3425 5845.67,3474.21
I3: "+5V I2.1" U10.6 | length 771.3
  Top Copper w5: U10.6 4946,3348.95 4946,3292 5030,3208 5375,3208 5518.76,3351.76 5530.3,3351.76 5554.33,3375.79
I4: "+5V I5.1" U10.5 | length 1090.1
  Top Copper w5: U10.5 4921.61,3289.39 5018,3193 5377,3193 5477.83,3092.17 5603.17,3092.17 5660.21,3149.21 5845.67,3149.21
I5: "+5V I4.1" U10.4 | length 818.1
  Top Copper w5: U10.4 4896.02,3288.98 5006,3179 5369,3179 5497.21,3050.79 5554.33,3050.79
I6: "+5V I7.1" U10.3 | length 1230.4
  Top Copper w5: U10.3 4869,3348.72 4869,3290 4996,3163 5364,3163 5702.79,2824.21 5845.67,2824.21
I7: "+5V I6.1" U10.2 | length 1156.8
  Top Copper w5: U10.2 4844.84,3286.16 4984,3147 5354,3147 5508.21,2992.79 5508.21,2734.72 5511.14,2731.79 5548.33,2731.79 5554.33,2725.79
I8: "+5V I9.1" U10.23 | length 1192.5
  Top Copper w5: 4450.79,4495.67 4450.79,4363.21 4497,4317 4497,4157 4561,4093 4823,4093 4844.84,4071.16 U10.23
I9: "+5V I8.1" U10.22 | length 876.9
  Top Copper w5: 4549.21,4204.33 4549.21,4124.79 4567,4107 4839,4107 4870.43,4075.57 U10.22
I10: "+5V I11.1" U10.21 | length 925.6
  Top Copper w5: 4775.79,4495.67 4825,4446.46 4825,4162 4896.02,4090.98 U10.21
I11: "+5V I10.1" U10.20 | length 604.1
  Top Copper w5: 4874.21,4204.33 4874.21,4162.79 4921.61,4115.39 U10.20
I12: "+5V I13.1" U10.19 | length 939.4
  Top Copper w5: U10.19 4947.2,4116.8 4987,4156.59 4987,4261 5100.79,4374.79 5100.79,4495.67
I13: "+5V I12.1" U10.18 | length 771.6
  Top Copper w5: U10.18 4972.8,4089.2 5005.59,4122 5132,4122 5165,4122 5199.21,4156.21 5199.21,4204.33
I14: "+5V I15.1" U10.17 | length 1182.3
  Top Copper w5: U10.17 4998.39,4075.39 5027,4104 5248,4104 5425.79,4281.79 5425.79,4495.67
I15: "+5V I14.1" U10.16 | length 1028.4
  Top Copper w5: U10.16 5023.98,4069.02 5040.95,4086 5445,4086 5524.21,4165.21 5524.21,4204.33
MD: Boot.1 R7.1 U4.26 | length 342.2
  Top Copper w8: Boot.1 3202,3646 3419.76,3646 3424.88,3651.12 R7.1 3424.88,3679.39 3440.57,3695.08 3450.03,3695.08 3475.58,3720.63 U4.26
NetC1_1: C1.1 L1.2 U2.5
NetC1_2: C1.2 U2.6 | length 93.3
  Top Copper w20: C1.2 2530.69,3021.8 2547.02,3021.8 2587.6,3062.38 U2.6
NetC2_1: C2.1 C3.1 TP2.1 U1.2 U2.2 U2.3
NetC6_2: C6.2 R24.2 U4.64 U10.1 | length 1144.9
  Top Copper w5.11: U4.64 3954.85,3898.72 3981.72,3898.72 3997.99,3914.99 4004.87,3914.99 C6.2 4039.13,3914.99 4233.01,3914.99 4738.88,3409.12 4738.88,3395.88 R24.2 4812.85,3384.76 4819.25,3378.36 U10.1
NetC12_2: C12.2 U4.5 | length 83.3
  Top Copper w8: U4.5 3794,3979.99 3794,4007 3804.92,4017.92 3804.92,4035.43 3820.61,4051.12 C12.2
NetC13_2: C13.2 L3.2 U4.56 | length 132.4
  Top Copper w8: U4.56 4016.75,3740.32 L3.2
  Top Copper w20: C13.2 L3.2
NetC14_2: C14.2 L2.2 U4.59 | length 134.5
  Top Copper w8: U4.59 4016.43,3799.37 L2.2
  Top Copper w20: L2.2 C14.2
NetC21_2: C21.2 R26.2 R27.2 | length 150
  Top Copper w5.11: R27.2 C21.2 R26.2
NetD2_1: D2.1 R4.1 | length 75
  Top Copper w20: D2.1 R4.1
NetD4_1: D4.1 R15.1 | length 75
  Top Copper w20: D4.1 R15.1
NetD5_2: "+ D11 -.2" D5.2 U5.3 | length 325.5
  Top Copper w30: D5.2 3385.5,2225 3400,2210.5 U5.3
  Top Copper w70: 3400,2000 U5.3
NetD6_2: "+ D12 -.2" D6.2@3941,2225 U6.3 | length 325.5
  Top Copper w30: D6.2@3941,2225 4032,2225 4042,2215 4045.5,2215 4050,2210.5 U6.3
  Top Copper w70: 4050,2000 U6.3
NetD7_2: "+ D13 -.2" D7.2 U7.3 | length 325.5
  Top Copper w30: D7.2 4608.79,2225 4609.21,2224.57 4682.43,2224.57 4687.5,2219.5 4691,2219.5 4700,2210.5 U7.3
  Top Copper w70: 4700,2000 U7.3
NetD8_2: "+ D10 -.2" D8.2 U8.3 | length 325.5
  Top Copper w30: D8.2 5258.79,2225 5259.21,2224.57 5332.43,2224.57 5337.5,2219.5 5341,2219.5 5350,2210.5 U8.3
  Top Copper w70: 5350,2000 U8.3
NetL2_1: L2.1 R9.2 | length 65.9
  Top Copper w20: L2.1 4081,3803.94 4143.94,3803.94 R9.2
NetR1_2: R1.2 U1.1 | length 55.1
  Top Copper w30: R1.2 U1.1@2576,2833
NetR2_1: R2.1 U3.4 | length 57
  Top Copper w10: U3.4 2644.71,3468.88 R2.1@2700,3468.88
NetR3_1: R3.1 U3.8 | length 63.3
  Top Copper w10: R3.1 2569,3581.88 2569,3550.1 2584.47,3534.63 U3.8
NetR5_2: R5.2 U4.16 | length 93.8
  Top Copper w8: R5.2 3537,4008.09 3564.73,3980.37 3576.08,3980.37 U4.16
NetR6_1: R6.1 U4.27 | length 134.3
  Top Copper w8: R6.1 3424.76,3613.31 3440.45,3629 3450,3629 3457.56,3636.56 3457.56,3682.92 3475.58,3700.94 U4.27
NetR10_1: R10.1 R11.2 U4.49 | length 133.9
  Top Copper w8: U4.49 4015.64,3602.52 R11.2
  Top Copper w20: R10.1 R11.2
NetR16_1: R16.1 U4.34 | length 1230.8
  Top Copper w8: R16.1 3370.12,2473.12 3398,2501 3468.29,2501 3596.65,2629.35 U4.34
NetR16_2: R16.2 R17.2 U5.1 | length 134.9
  Top Copper w20: R16.2 R17.2 3436.5,2343.38 3436.5,2293.5 U5.1
NetR18_1: R18.1 U4.35 | length 1399.1
  Top Copper w8: U4.35 3616.33,2626.44 3684.77,2558 3917,2558 4020.12,2454.88 R18.1
NetR18_2: R18.2 R19.2 U6.1 | length 124.9
  Top Copper w20: R19.2 R18.2 ; U6.1@4086.5,2293.5 R19.2@4086.5,2343.38
NetR20_1: R20.1 U4.36 | length 2026.8
  Top Copper w8: U4.36 3636.02,2629.02 3690.03,2575 4548,2575 4670.12,2452.88 R20.1
NetR20_2: R20.2 R21.2 U7.1 | length 124.9
  Top Copper w20: R21.2 R20.2 ; U7.1@4736.5,2293.5 R21.2@4736.5,2343.38
NetR22_1: R22.1 U4.37 | length 2658.7
  Top Copper w8: U4.37 3655.7,2631.3 3696,2591 5187,2591 5320.12,2457.88 R22.1
NetR22_2: R22.2 R23.2 U8.1 | length 124.9
  Top Copper w20: R23.2 R22.2 ; U8.1@5386.5,2293.5 R23.2@5386.5,2343.38
NetR25_2: R25.2 U4.41 U10.15 | length 1772.5
  Top Copper w8: v1(3716,3584) 3716,3580.84 3734.44,3562.4 U4.41 ; v1(5046.68,3567.32) 5048.12,3568.77 5048.12,3618.4 U10.15 5049.57,3668.57 5058,3677 5157,3677 5170,3664 R25.2
  Bottom Copper w8: v1(3716,3584) 3716,3582 3849,3449 4852,3449 4919,3516 4995.35,3516 v1(5046.68,3567.32)
NetR26_1: R26.1 SW3.3 | length 142.6
  Top Copper w5.11: R26.1 4400,3019.49 4421.07,2998.43 SW3.3
NetR27_1: R27.1 SW3.6 | length 142.6
  Top Copper w5.11: SW3.6 4228.93,2998.43 4250,3019.49 R27.1
NetU4_9: U4.9 Y1.1 | length 119
  Top Copper w8: U4.9 3714.76,4008.76 3741.6,4035.6 3758.37,4035.6 3762.24,4039.47 Y1.1
NetU4_10: U4.10 Y1.3 | length 100.8
  Top Copper w8: Y1.3 3671.63,4065.13 3671.63,4035.6 3695.07,4012.16 U4.10
NetU4_28: U4.28 U10.13 | length 1827.8
  Top Copper w8: U4.28 3495.69,3680.84 3554.58,3680.84 v1(3555,3680.42) ; U10.13 5100.87,3619.72 5100.87,3567.13 v1(5101,3567)
  Bottom Copper w8: v1(3555,3680.42) 3576,3659.42 3588.58,3659.42 3828,3420 4868,3420 4931,3483 5017,3483 v1(5101,3567)
NetU4_29: U4.29 U10.14 | length 1796.3
  Top Copper w8: U4.29 3571.88,3661.57 3590,3679.7 v1(3590,3680) ; v1(5073,3567) 5074.08,3568.08 5074.08,3618.77 U10.14
  Bottom Copper w8: v1(3590,3680) 3836,3434 4860,3434 4924,3498 5004,3498 v1(5073,3567)
NetU4_30: U4.30 U10.11 | length 1748.8
  Top Copper w8: U4.30 3495.69,3642.31 3554.58,3642.31 v1(3555,3642.73) ; U10.11 5075.58,3350.57 5075.58,3407.58 v1(5076,3408)
  Bottom Copper w8: v1(3555,3642.73) 3581.27,3642.73 3818,3406 4876.26,3406 4891.11,3420.84 5060,3420.84 5072.84,3408 v1(5076,3408)
NetU4_31: U4.31 U10.10 | length 1705.3
  Top Copper w8: U4.31 3539.63,3622.2 3551.84,3610 v1(3555,3610) ; v1(5049,3402) 5049.28,3401.72 5049.28,3350.44 U10.10
  Bottom Copper w8: v1(3555,3610) 3590.65,3610 3808.65,3392 4888,3392 4898,3402 v1(5049,3402)
NetU4_45: U4.45 U9.1 | length 350.7
  Top Copper w8: U4.45 3813.18,3483.69 3808.49,3479 3808.02,3479 3794,3464.98 3794,3404 3813,3385 3957,3385 3972.44,3400.44 3972.44,3429.72 U9.1
NetU4_46: U4.46 U9.4 | length 91.8
  Top Copper w8: U9.4 3825,3472 3832.87,3479.87 U4.46
P501_TXD: SWD.8 U4.50 | length 1441.9
  Top Copper w8: v1(3916,3616) 3919.16,3616 3924.45,3621.28 3933.32,3621.28 3934.24,3622.2 U4.50
  Bottom Copper w8: SWD.8@2966.73,4470.83 2964.91,4472.66 2962.56,4475 SWD.8 2950,4440 2962,4428 3121.31,4428 3126,4423.31 3126,4354 3864.28,3615.72 v1@3915.91,3615.72
P502_RXD: SWD.7 U4.51 | length 1532.9
  Top Copper w8: v1(3916,3649) 3919.16,3649 3925.35,3642.81 3953.01,3642.81 U4.51
  Bottom Copper w8: SWD.7 2950,4558 2962,4570 3119,4570 3144,4545 3144,4363 3858,3649 v1(3916,3649)
R\E\S\E\T\: R8.1 RST.1 RST.2 SWD.10 U4.25 | length 1480.1
  Top Copper w8: SWD.10 2900,4433 2983,4350 R8.1 ; RST.2 RST.1 3308.68,4417.31 3308.68,4390.32 3320.12,4378.88 R8.1 ; U4.25 3495.61,3740.66 3539.66,3740.66 v1(3540,3741) ; v1(3542,3867) 3542,3966 3320.12,4187.88 R8.1
  Bottom Copper w8: v1(3540,3741) 3541,3742 3541,3866 v1(3542,3867)
SCL: J5.3 R12.1 U4.48 | length 1174.6
  Top Copper w8: R12.1 J5.3
  Top Copper w10: U4.48 3872.24,3527.76 3872.31,3527.84 v1(3888,3527.84)
  Bottom Copper w8: v1(3888,3527.84) 3921.84,3527.84 3975,3581 3975,4433 4025,4483 J5.3
SDA: J5.4 R13.1 U4.47 | length 1174.7
  Top Copper w8: R13.1 J5.4
  Top Copper w10: v1(3852,3562) 3852.47,3561.53 3852.47,3520.91 U4.47
  Bottom Copper w8: v1(3852,3562) 3919,3562 3955,3598 3955,4434 3925,4464 J5.4
SWCLK: SWD.4 U4.32 | length 1092.2
  Top Copper w8: SWD.4 3051,4474 3051,4375 v1(3052,4374) ; v1(3494,3585) 3494,3601.6 3494.92,3602.52 U4.32
  Bottom Copper w8: v1(3052,4374) 3494,3932 v1(3494,3585)
SWDIO: SWD.2 U4.33 | length 1151.8
  Top Copper w8: SWD.2 3102,4473 3102,4376 v1(3104,4374) ; U4.33 v1(3577,3557)
  Bottom Copper w8: v1(3104,4374) 3104,4348 3514,3938 3514,3620 v1(3577,3557)
USB_D_N: D1.2 J2.2 U4.18 | length 988.6
  Top Copper w11: J2.2 2602.95,4022.45 2690.78,4022.45 2690.95,4022.28 2739.13,4022.28 2745.57,4028.72 ; D1.2 2746.43,4051.57 2746.43,4028.72 2752.87,4022.28 2791.7,4022.28 2796.52,4027.1 2846.9,4027.1 2996.08,3877.92 3495.08,3877.92 U4.18
USB_D_P: D1.3 J2.3 U4.19 | length 988.6
  Top Copper w11: J2.3 2602.95,4003.15 2682.79,4003.15 2682.95,4002.98 2739.13,4002.98 2745.57,3996.54 ; D1.3 2746.43,3973.69 2746.43,3996.54 2752.87,4002.98 2799.7,4002.98 2804.51,4007.8 2838.91,4007.8 2845.35,4001.35 2988.09,3858.62 3495.08,3858.62 U4.19
VUSB: D1.4 D3.2 J2.1 U3.6 | length 1084.6
  Top Copper w5: U3.6 2625,3529.09 2625,3575
  Top Copper w8: 2508,3827 2616,3827 2730,3941 2816.12,3941 2820.8,3945.69 D1.4
  Top Copper w30: J2.1@2585.28,4057.36 2567.64,4057.36 2558.82,4066.18 2506.56,4066.18 2502.15,4061.77 2501.35,4061.77 2477,4037.43 2477,3931.6 2508,3900.6 2508,3827 D3.2 2508,3711.38 2625,3594.38 2625,3575
pads on no net: J2.4 J2.SH1 J2.SH2 J2.SH3 SW3.1 SW3.4 SWD.6 U4.1 U4.2 U4.3 U4.6 U4.7 U4.12 U4.13 U4.14 U4.15 U4.22 U4.23 U4.24 U4.38 U4.52 U4.53 U4.54 U4.55 U4.58 U4.60 U4.61 U4.62 U4.63 U9.8

## Polygon pours and split planes (outlines as drawn)
BUCK_OUT on Top Copper "BUCK_OUT_L01_P015" (solid, pour order 15): 2618,3461 2630,3461 2630,3452 2658,3424 2658,3354 2588,3354 2588,3422 2618,3452
VUSB on Top Copper "Top Copper-VUSB" (solid, pour order 22): 2617,3539 2631,3539 2631,3559 2640,3568 2640,3579 2610,3579 2610,3567 2617,3560
GND on Top Copper "GND_L01_P031" (solid, pour order 31): 5345,2270 5345,2370 5295,2370 5275,2390 5275,2435 5145,2435 5145,2270
GND on Top Copper "GND_L01_P030" (solid, pour order 30): 4695,2270 4695,2370 4645,2370 4625,2390 4625,2435 4495,2435 4495,2270
GND on Top Copper "GND_L01_P029" (solid, pour order 29): 4045,2270 4045,2370 3995,2370 3975,2390 3975,2435 3845,2435 3845,2270
+12V on Top Copper "Top Copper-+12V" (solid, pour order 25): 5200,1840 5200,2150 3100,2150 2900,2350 2500,2350 2500,2200 2860,1840
GND on Top Copper "GND_L01_P028" (solid, pour order 28): 3395,2270 3395,2370 3345,2370 3325,2390 3325,2435 3195,2435 3195,2270
BUCK_OUT on Top Copper "BUCK_OUT_L01_P014" (solid, pour order 14): 2568,3312 2568,3256 2659,3256 2733,3182 2849,3182 2849,3227 2766,3227 2681,3312
+5V on Top Copper "+5V_L01_P017" (solid, pour order 17): 2517,3555 2517,3449 2549,3449 2568,3491 2597,3491 2597,3507 2568,3507 2567,3508 2549,3555
+5V on Top Copper "+5V_L01_P016" (solid, pour order 16): 2611,3457 2597,3457 2597,3541 2611,3541
GND on Top Copper "Top Copper-GND" (solid, pour order 13): 2648,3048 2727,2969 3088,2969 3088,3088 2921.85,3088 2922,3088 2846,3165 2729,3165 2729,3141 2677,3089 2648,3089
NetC1_1 on Top Copper "Top Copper-NetC1_1" (solid, pour order 9): 2555.12,3122 2577,3122 2611,3088 2611,3048 2639,3048 2639,3088 2673,3122 2682,3122 2682,3178 2503,3178 2500,3175 2500,3051 2542,3051 2542.8,3107.92
+12V on Top Copper "+12V_L01_P003" (solid, pour order 3): 2516,2722 2516,2881 2502,2895 2461,2895 2446,2880 2446,2722
NetC2_1 on Top Copper "Top Copper-NetC2_1" (solid, pour order 2): 2556,2903 2597,2903 2704,2796 3088,2796 3088,2915 2715,2915 2677,2958.5 2677,3002 2611,3002 2611,2947 2596,2932 2556,2932
GND on Plane (GND) (split plane): 5957.84,4679.61 5965.61,4678.46 5973.22,4676.55 5980.61,4673.91 5987.71,4670.55 5994.44,4666.51 6000.75,4661.84 6006.57,4656.57 6011.84,4650.75 6016.51,4644.44 6020.55,4637.71 6023.91,4630.61 6026.55,4623.22 6028.46,4615.61 6029.61,4607.84 6029.97,4600.63 6029.9,4600 6029.9,1800 6029.97,1799.37 6029.61,1792.16 6028.46,1784.39 6026.55,1776.78 6023.91,1769.39 6020.55,1762.29 6016.51,1755.56 6011.84,1749.25 6006.57,1743.43 6000.75,1738.16 5994.44,1733.49 5987.71,1729.45 5980.61,1726.09 5973.22,1723.45 5965.61,1721.54 5957.84,1720.39 5950.63,1720.03 5950,1720.1 2450,1720.1 2449.37,1720.03 2442.16,1720.39 2434.39,1721.54 2426.78,1723.45 2419.39,1726.09 2412.29,1729.45 2405.56,1733.49 2399.25,1738.16 2393.43,1743.43 2388.16,1749.25 2383.49,1755.56 2379.45,1762.29 2376.09,1769.39 2373.45,1776.78 2371.54,1784.39 2370.39,1792.16 2370.03,1799.37 2370.1,1800 2370.1,4600 2370.03,4600.63 2370.39,4607.84 2371.54,4615.61 2373.45,4623.22 2376.09,4630.61 2379.45,4637.71 2383.49,4644.44 2388.16,4650.75 2393.43,4656.57 2399.25,4661.84 2405.56,4666.51 2412.29,4670.55 2419.39,4673.91 2426.78,4676.55 2434.39,4678.46 2442.16,4679.61 2449.37,4679.97 2450,4679.9 5950,4679.9 5950.63,4679.97
+5V on Plane (+5V) (split plane): 5957.84,4679.61 5965.61,4678.46 5973.22,4676.55 5980.61,4673.91 5987.71,4670.55 5994.44,4666.51 6000.75,4661.84 6006.57,4656.57 6011.84,4650.75 6016.51,4644.44 6020.55,4637.71 6023.91,4630.61 6026.55,4623.22 6028.46,4615.61 6029.61,4607.84 6029.97,4600.63 6029.9,4600 6029.9,1800 6029.97,1799.37 6029.61,1792.16 6028.46,1784.39 6026.55,1776.78 6023.91,1769.39 6020.55,1762.29 6016.51,1755.56 6011.84,1749.25 6006.57,1743.43 6000.75,1738.16 5994.44,1733.49 5987.71,1729.45 5980.61,1726.09 5973.22,1723.45 5965.61,1721.54 5957.84,1720.39 5950.63,1720.03 5950,1720.1 2450,1720.1 2449.37,1720.03 2442.16,1720.39 2434.39,1721.54 2426.78,1723.45 2419.39,1726.09 2412.29,1729.45 2405.56,1733.49 2399.25,1738.16 2393.43,1743.43 2388.16,1749.25 2383.49,1755.56 2379.45,1762.29 2376.09,1769.39 2373.45,1776.78 2371.54,1784.39 2370.39,1792.16 2370.03,1799.37 2370.1,1800 2370.1,4600 2370.03,4600.63 2370.39,4607.84 2371.54,4615.61 2373.45,4623.22 2376.09,4630.61 2379.45,4637.71 2383.49,4644.44 2388.16,4650.75 2393.43,4656.57 2399.25,4661.84 2405.56,4666.51 2412.29,4670.55 2419.39,4673.91 2426.78,4676.55 2434.39,4678.46 2442.16,4679.61 2449.37,4679.97 2450,4679.9 5950,4679.9 5950.63,4679.97

## Other copper
Top Copper:
  region: 5018.79,2950.73 5017.64,2950.73 5017.64,2951.88 5016.49,2951.88 5016.49,2953.04 5018.79,2953.04 5018.79,2951.88
  region: 5004.14,2937.71 5003.64,2937.71 5003.64,2938.21 5003.15,2938.21 5003.15,2938.71 5004.14,2938.71 5004.14,2938.21

## Silkscreen, mask and mechanical layers (free items; w line width, h text height)
Top Overlay:
  drawing of 2 lines, arcs and shapes, not listed
  text "GND   SDA" at 4200,4673 h40 r180
  text "+5V   SCL   D3" at 4310,4617 h40 r180
  text "PWR" at 2405,4338 h40 r270
  text "USB" at 2397,4055 h40 r270
  text "|" at 2652,3760 h40
  text "Term. Off" at 4163,2664 h40
  text "UIC Hyperloop" at 4684,2634.33 h40
Bottom Overlay:
  text "Designed by Ephren Manning" at 4015,2651.33 h40
  text "Powered by Chobani" at 3883,2564.33 h40
Mechanical 1:
  the board outline again, w10

## Text inside footprints (layer, text, board x,y; h text height)
C2: Top Overlay "+" at 2916,2845 h48 r270
C3: Top Overlay "+" at 3146,2838 h48 r270
C15: Top Overlay "+" at 3070,2310 h48 r180
C16: Top Overlay "+" at 3720,2310 h48 r180
C17: Top Overlay "+" at 4370,2310 h48 r180
C18: Top Overlay "+" at 5020,2310 h48 r180
D5: Top Overlay "|" at 3125,2200 h50
D6: Top Overlay "|" at 3775,2200 h50
D7: Top Overlay "|" at 4425,2200 h50
D8: Top Overlay "|" at 5075,2200 h50